# Altium PCB DDSSHEILD_rev_04.PcbDoc
Units mil, origin at the board's own origin, x right, y up, seen from the top; angles counter-clockwise.
Board outline 6000 x 4000 mil, 2 copper layers (Top Layer, Bottom Layer); 19 components, 15 nets, 90 pads, 17 vias.
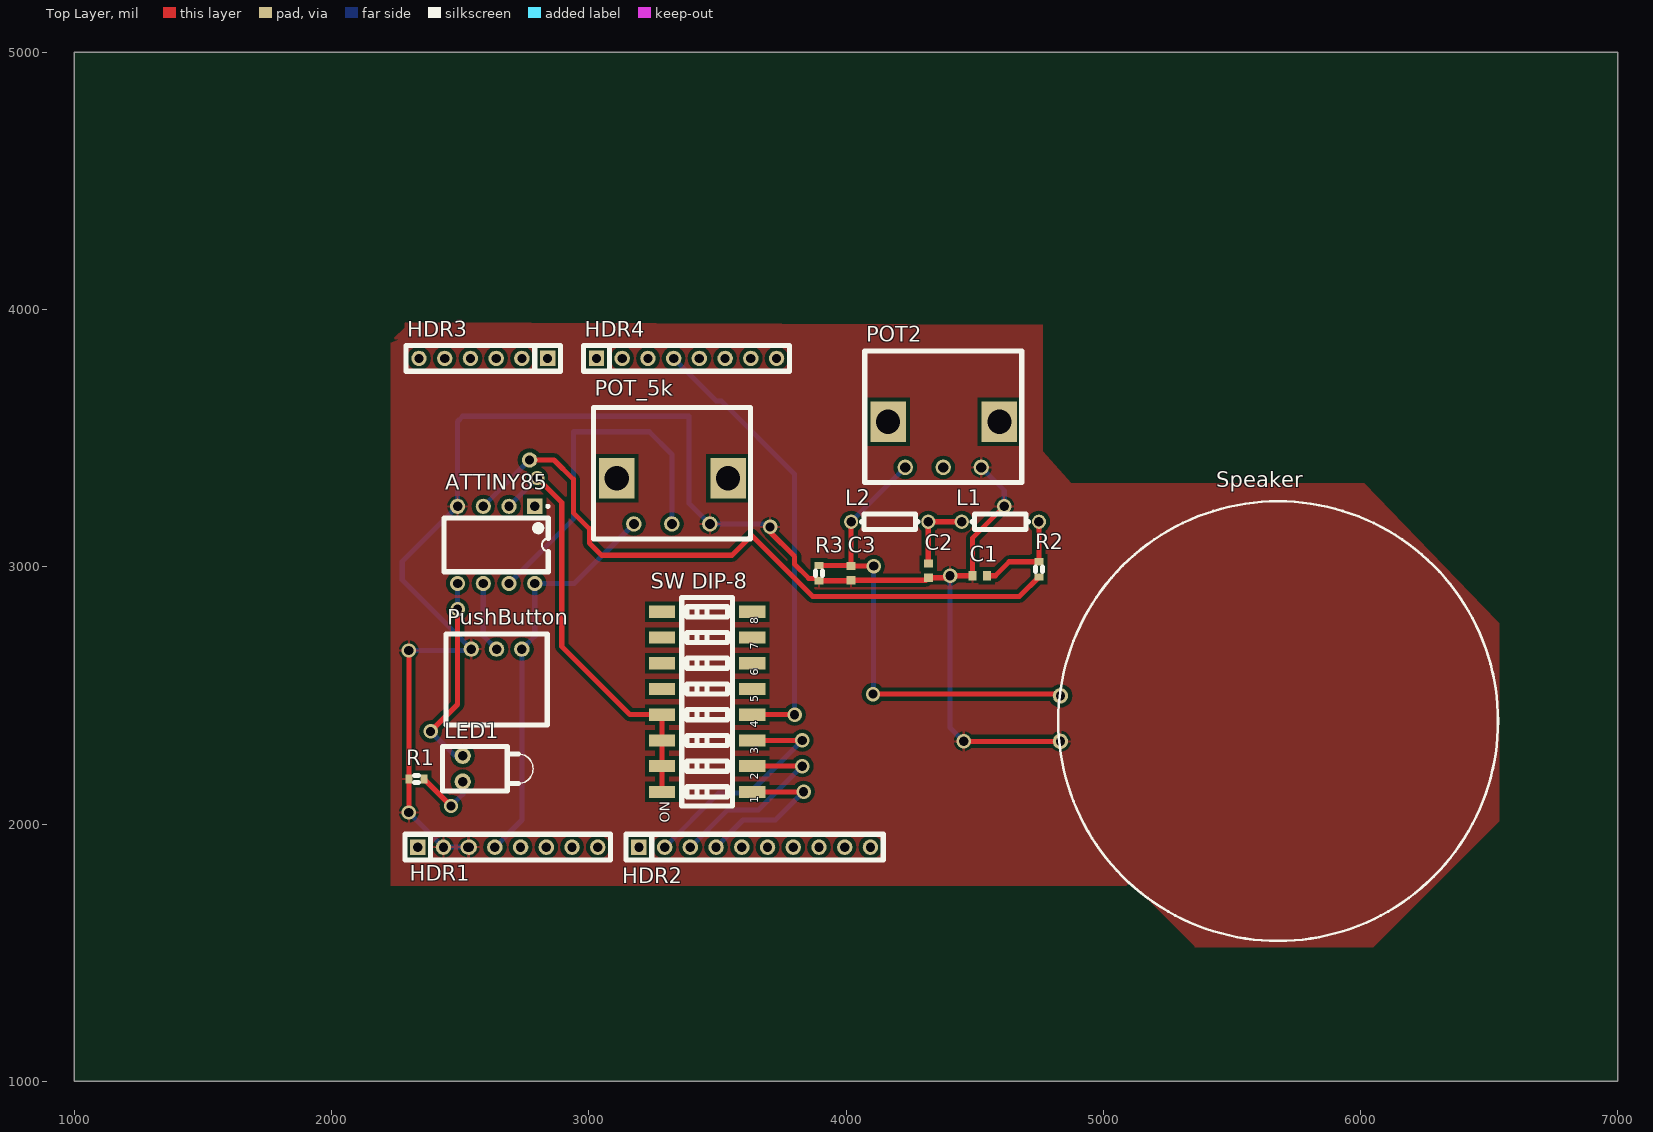
[diagram p0: Top Layer view]
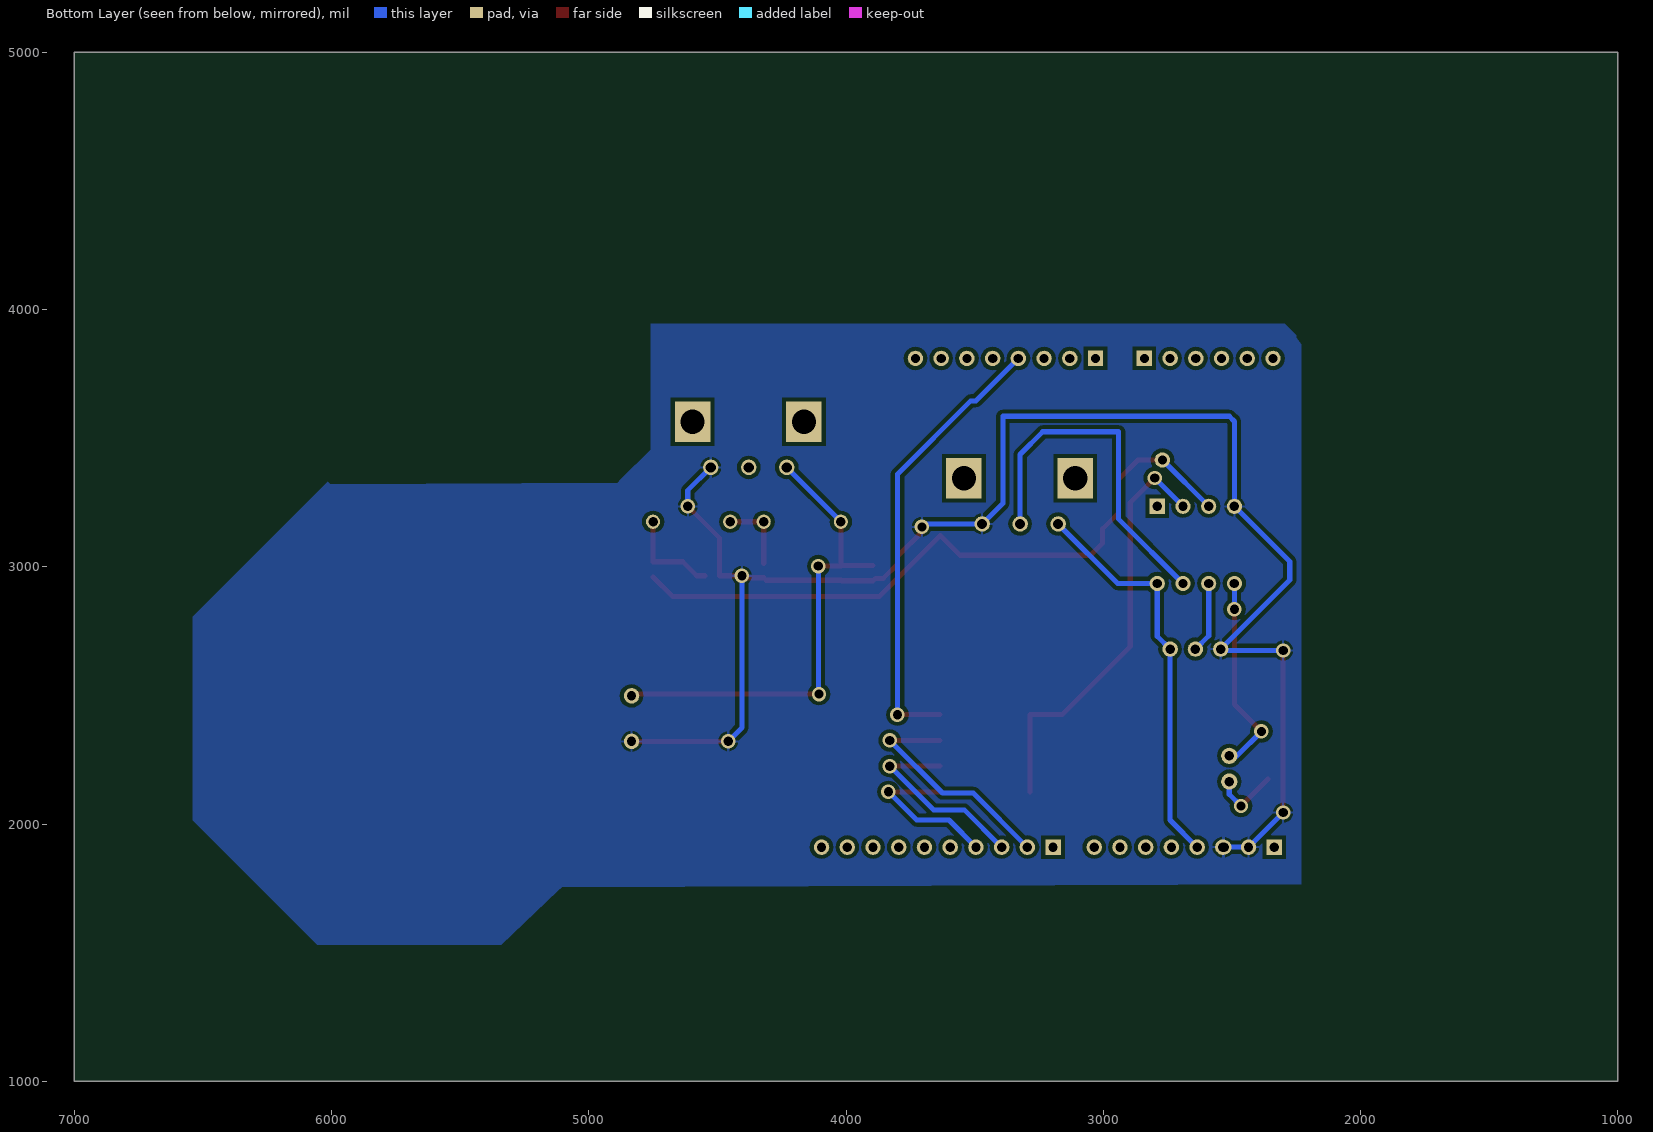
[diagram p1: Bottom Layer view, seen from below]

## Layer stack, top to bottom
Top Solder: solder mask 0.4, Solder Resist, Dk 3.5
Top Layer: signal copper 1.4
Dielectric 1: dielectric 12.6, FR-4, Dk 4.8
Bottom Layer: signal copper 1.4
Bottom Solder: solder mask 0.4, Solder Resist, Dk 3.5

## Board outline
1000,1000 7000,1000 7000,5000 1000,5000

## Design rules (kind name [scope] priority, off if disabled: settings)
Clearance Clearance_1 [All] p1: gap=10
Clearance [All] p2: gap=15
PolygonConnect [All] p1: connectstyle=Relief reliefconductorwidth=10 reliefentries=4 polygonreliefangle="90 Angle" airgapwidth=10
RoutingVias [All] p1: holewidth=28 width=50 viastyle="Through Hole" minholewidth=28 minwidth=50 maxholewidth=28 maxwidth=50
SolderMaskExpansion [All] p1: expansion=4
Width [All] p1: maxlimit=20 minlimit=10 preferedwidth=10 minimp=50.000000 maximp=50.000000 favimp=50.000000
30 further rules are at their usual default settings.

## Components (designator, comment, footprint, x,y, rotation, side; value= is the part's Value field where it differs from the comment)
ATTINY85 "IC1" DIP-8 2640,3085 r270 top
C1 "Cap Semi" 1608[0603] 4520,2965 r0 top
C2 "Cap Semi" 1608[0603] 4320,2985 r90 top
C3 "Cap Semi" 1608[0603] 4020,2975 r90 top
HDR1 "POWER_UNO" "Header 8x1 8.5mm" 2335,1910 r0 top
HDR2 "IOH" "Header 10x1 8.5mm" 3195,1910 r0 top
HDR3 "AD" "Header 6x1 8.5mm" 2840,3810 r180 top
HDR4 "IOL" "Header 8x1 8.5mm" 3030,3810 r0 top
L1 "Inductor" AXIAL-0.3 4600,3175 r180 top
L2 "Inductor" AXIAL-0.3 4170,3175 r180 top
LED1 "LED1" LED-1 2510,2215 r0 top
POT2 "Component_1" "POT Footprint_Rev_1" 4685,3840 r0 top
POT_5k "POT1" "POT Footprint_Rev_1" 3630,3620 r0 top
PushButton "BUTTON1" PushButtonFrame 2740,2680 r180 top
R1 "Res3" J1-0603 2330,2175 r0 top
R2 "Res3" J1-0603 4750,2990 r270 top
R3 "Res3" J1-0603 3895,2975 r90 top
Speaker "SPKR1" PCBComponent_1 5680,2400 r0 top
"SW DIP-8" "DIP1" DIP_SW_8WAY_SMD 3460,2475 r90 top

## Footprints (in the part's own frame and the unit in brackets; to place one, negate y for a bottom-side part, rotate by r counter-clockwise, add the part's x,y. Pads: shape width x height; smd on the part's side, far side on the other; paste and mask are expansions set on the pad)
1608[0603] [mm] "Chip Capacitor, Body 1.6x0.8mm, IPC High Density"
  rect 0.8x0.9 smd paste+0.508 mask+0.254: 1(-0.7,0) 2(0.7,0)
  body extent -0.87,-0.48 0.87,0.48, height 1.3
AXIAL-0.3 [mm] "Axial Device, Thru-Hole; 2 Leads; 0.3 in Pin Spacing"
  round 1.4 hole 0.926 paste+0.508 mask+0.254: 1(-3.81,0) 2(3.81,0)
  silkscreen extent -2.77,-0.76 2.77,0.76
DIP-8 [mm] "DIP; 8 Leads; Row Spacing 7.62 mm; Pitch 2.54 mm"
  rect 1.5x1.5 hole 0.925 paste+0.508 mask+0.254: 1(-3.81,3.81)
  round 1.5 hole 0.925 paste+0.508 mask+0.254: 2(-3.81,1.27) 3(-3.81,-1.27) 4(-3.81,-3.81) 5(3.81,-3.81) 6(3.81,-1.27) 7(3.81,1.27) 8(3.81,3.81)
  silkscreen extent -3.93,-5.15 2.65,5.24, body extent -3.6,-5.15 3.6,5.15, height 5.08
DIP_SW_8WAY_SMD [mm] "DIP Switch; 16 Leads"
  rect 1.2x2.6 smd paste+0.508 mask+0.254: 1(-8.89,-4.45) 2(-6.35,-4.45) 3(-3.81,-4.45) 4(-1.27,-4.45) 5(1.27,-4.45) 6(3.81,-4.45) 7(6.35,-4.45) 8(8.89,-4.45) 9(8.89,4.45) 10(6.35,4.45) 11(3.81,4.45) 12(1.27,4.45) 13(-1.27,4.45) 14(-3.81,4.45) 15(-6.35,4.45) 16(-8.89,4.45)
  silkscreen extent -10.29,-2.5 10.31,2.5
"Header 6x1 8.5mm" [mil] "Stackable 6 pin header"
  rect 60x60 hole 36 paste+20 mask+10: 1(0,0)
  round 60 hole 36 paste+20 mask+10: 2(100,0) 3(200,0) 4(300,0) 5(400,0) 6(500,0)
  silkscreen extent -50,-50 550,50, body extent -50,-50 550,50, height 335
"Header 8x1 8.5mm" [mil] "Stackable 8 pin header"
  rect 60x60 hole 36 paste+20 mask+10: 1(0,0)
  round 60 hole 36 paste+20 mask+10: 2(100,0) 3(200,0) 4(300,0) 5(400,0) 6(500,0) 7(600,0) 8(700,0)
  silkscreen extent -50,-50 750,50, body extent -50,-50 750,50, height 335
"Header 10x1 8.5mm" [mil] "Stackable 10 pin header"
  rect 60x60 hole 36 paste+20 mask+10: 1(0,0)
  round 60 hole 36 paste+20 mask+10: 2(100,0) 3(200,0) 4(300,0) 5(400,0) 6(500,0) 7(600,0) 8(700,0) 9(800,0) 10(900,0)
  silkscreen extent -50,-50 950,50, body extent -50,-50 950,50, height 335
J1-0603 [mm] "Chip Resistor, Body 1.6x0.8mm, IPC High Density"
  rect 0.7x0.9 smd paste+0.508 mask+0.254: 1(-0.75,0) 2(0.75,0)
  silkscreen extent -0.2,-0.35 0.2,0.35, body extent -0.85,-0.48 0.85,0.48, height 0.9
LED-1 [mm] "LED; 2 Leads"
  round 1.6 hole 0.927 paste+0.508 mask+0.254: 1(0,1.27) 2(0,-1.27)
  silkscreen extent -2,-2.2 6.95,2.2
PCBComponent_1 [mil]
  round 60 hole 36 paste+20 mask+10: 0(-846.46,98.43) 1(-846.46,-78.74)
  silkscreen extent -855,-855 855,855
"POT Footprint_Rev_1" [mm]
  round 1.524 hole 1 paste+0.508 mask+0.254: 0(-11.547,-11.521) 1(-7.797,-11.521) 2(-4.047,-11.521)
  rect 3.5x4 hole 2.4 paste+0.508 mask+0.254: Sold(-13.247,-7.021) Sold(-2.247,-7.021)
  silkscreen extent -15.55,-13.02 -0.05,-0.02
PushButtonFrame [mil]
  round 60 hole 36.5 paste+20 mask+10: 0(0,0) 1(98.43,0) 2(196.85,0)
  silkscreen extent -98,-59 295,295

## Part data
ATTINY85: library part ATtiny85-20PU, "Low Power tinyAVR® 8-Bit Microcontroller, 8K Flash Memory, 20MHz, Industrial Temperature, 8-Lead PDIP, Pb-Free"
C1 C2 C3: "Capacitor (Semiconductor SIM Model)"
LED1: "Typical RED GaAs LED"
POT2: "5k RES"
POT_5k: library part Component_1, "5k RES"
PushButton: library part PushButton
R1 R2 R3: "Resistor"
Speaker: library part Component_1
"SW DIP-8": library part "SW DIP-8", "DIP Switch, 8 Position, SPST"

## Free pads (board coordinates)
  round 60 hole 36 paste+20 mask+10: 0(2770,3415)

## Via types
v1: diameter 56, hole 36, Top Layer to Bottom Layer, 17 vias

## Nets (pads, with @x,y where several pads share a name; then routed paths per layer and width w, separated by ;. In a path a pad name is that pad's centre, name@x,y a point inside that pad or via, vN(x,y) a via of type N, cw(c..) or ccw(c..) an arc to the next point about the centre after c; other vN are vias at no path point)
ARD_SIG_HEADER_PIN_04: "SW DIP-8.4" HDR4.4 | length 1756.2
  Top Layer w20: 3635.2,2425 v1(3800,2425)
  Bottom Layer w20: HDR4.4 3495,3645 3515,3645 3800,3360 v1(3800,2425)
ARD_SIG_HEADER_PIN_09: "SW DIP-8.3" HDR2.2 | length 901.7
  Top Layer w20: 3635.2,2325 v1(3830,2325)
  Bottom Layer w20: HDR2.2 3505,2120 3625,2120 v1(3830,2325)
ARD_SIG_HEADER_PIN_10: "SW DIP-8.2" HDR2.3 | length 760.3
  Top Layer w20: 3635.2,2225 v1(3830,2225)
  Bottom Layer w20: HDR2.3 3540,2055 3660,2055 v1(3830,2225)
ARD_SIG_HEADER_PIN_11: "SW DIP-8.1" HDR2.4 | length 628.9
  Top Layer w20: 3635.2,2125 v1(3835,2125)
  Bottom Layer w20: HDR2.4 3600,2015 3725,2015 v1(3835,2125)
ARDU_TO_TINY_MAINSIGNAL: "SW DIP-8.13" "SW DIP-8.14" "SW DIP-8.15" "SW DIP-8.16" ATTINY85.2 | length 1649.5
  Top Layer w20: v1(2800,3345) 2895,3250 2895,2690 3160,2425 3284.8,2425 3284.8,2325 3284.8,2225 3284.8,2125
  Bottom Layer w20: ATTINY85.2 v1(2800,3345)
DIGITAL_MODE_SWITCH: ATTINY85.6 PushButton.1 | length 276.4
  Bottom Layer w20: ATTINY85.6 2590,2731.57 PushButton.1
"DSS RC": C1.2 L1.1 R2.1 | length 380.5
  Top Layer w20: C1.2 4580,2965 4634.53,3019.53 R2.1 L1.1
"DSS SIGNAL OUT": ATTINY85.3 pad.0 R2.2 | length 2657
  Top Layer w20: pad.0 2865,3415 2940,3340 2940,3210 3002.22,3147.78 3002.22,3092.78 3050,3045 3557.16,3045 3633.58,3121.42 3870,2885 4674.53,2885 R2.2
  Bottom Layer w20: ATTINY85.3 pad.0
GND: ATTINY85.4 C1.1 C2.1 C3.1 HDR1.2 HDR1.3 POT2.2 POT_5k.2 PushButton.2 R1.1 R3.1 Speaker.1 | length 6301.1
  Top Layer w20: v1(2300.47,2044.53) R1.1 v1(2300.47,2674.53) ; v1(2530,1910) HDR1.3 ; v1(3705,3155) 3705,3135.47 3800,3040.47 3800,3010 3855,2955 3885.47,2955 R3.1 4018.03,2945.47 C3.1 4310,2947.44 C2.1 v1@4404.53,2957.44 ; v1(4404.53,2965) C1.1 4492.44,3112.44 v1(4615,3235) ; v1(4457.8,2321.26) Speaker.1
  Bottom Layer w20: v1(2300.47,2044.53) HDR1.2 v1(2530,1910) ; v1(2300.47,2674.53) PushButton.2@2537.68,2674.53 ; PushButton.2 2275,2948.15 2275,3020 ATTINY85.4 2490,3565 2510,3585 3390,3585 3390,3247.09 POT_5k.2 3693.58,3166.42 v1(3705,3155) ; v1(4404.53,2965) 4404.53,2374.53 v1(4457.8,2321.26) ; POT2.2 4615,3297.09 v1(4615,3235)
LED_TO_RESISTOR: LED1.2 R1.2 | length 262.3
  Top Layer w20: R1.2 v1(2464.53,2070)
  Bottom Layer w20: v1(2464.53,2070) 2510,2115.47 LED1.2
MANUAL_FREQUENCY_SIGNAL: ATTINY85.7 POT_5k.1 | length 1383.6
  Bottom Layer w20: ATTINY85.7 2940,3185 2940,3525 3235,3525 3323.03,3436.97 POT_5k.1
NetC2_2: C2.2 L1.2 L2.1 | length 289.5
  Top Layer w20: C2.2 L2.1 4440,3175 L1.2@4445,3170
NetC3_2: C3.2 L2.2 POT2.0 R3.2 Speaker.0 | length 1914.1
  Top Layer w20: R3.2 4018.03,3004.53 C3.2 ; L2.2 C3.2 ; v1(4105,2505) 4826.97,2505 Speaker.0 ; v1(4107.44,3002.56) C3.2
  Bottom Layer w20: L2.2 4020,3176.02 POT2.0 ; v1(4105,2505) 4107.44,2507.44 v1(4107.44,3002.56)
TINY_TO_LED_SIGNAL_OUT: ATTINY85.5 LED1.1 | length 782.8
  Top Layer w20: v1(2385,2360) 2490,2465 v1(2490,2835)
  Bottom Layer w20: v1(2385,2360) 2480,2265 LED1.1 ; v1(2490,2835) ATTINY85.5
VCC: ATTINY85.8 HDR1.4 POT_5k.0 PushButton.0 | length 1570.5
  Bottom Layer w20: HDR1.4 2740,2015 PushButton.0 2790,2730 ATTINY85.8 2943.98,2935 POT_5k.0
pads on no net: "SW DIP-8.5" "SW DIP-8.6" "SW DIP-8.7" "SW DIP-8.8" "SW DIP-8.9" "SW DIP-8.10" "SW DIP-8.11" "SW DIP-8.12" ATTINY85.1 HDR1.1 HDR1.5 HDR1.6 HDR1.7 HDR1.8 HDR2.1 HDR2.5 HDR2.6 HDR2.7 HDR2.8 HDR2.9 HDR2.10 HDR3.1 HDR3.2 HDR3.3 HDR3.4 HDR3.5 HDR3.6 HDR4.1 HDR4.2 HDR4.3 HDR4.5 HDR4.6 HDR4.7 HDR4.8 POT2.1 POT2.Sold POT_5k.Sold

## Polygon pours and split planes (outlines as drawn)
GND on Top Layer "Top Layer-No Net" (solid, pour order 4): 2230,3870 2230,1760 5090,1760 5105,1775 5355,1525 5355,1520 6050,1520 6540,2010 6540,2025 6540,2780 6530,2790 6015,3325 5960,3325 4875,3325 4765,3450 4765,3530 4765,3940 4725,3940 2285,3950 2285,3930 2240,3885 2265,3885
GND on Bottom Layer "Top Layer-No Net" (solid, pour order 6): 2230,3865 2230,1765 5105,1755 5120,1740 5340,1530 6025,1530 6055,1530 6530,2005 6540,2015 6540,2795 6540,2805 6015,3330 6005,3320 4887.5,3327.5 4875,3340 4760,3455 4760,3945 2295,3945 2285,3935 2250,3900 2250,3890

## Silkscreen, mask and mechanical layers (free items; w line width, h text height)
Top Overlay:
  text "Vin" at 3055,6180 h20 r225
  text "GND" at 3155,6180 h20 r225
  text "GND" at 3255,6180 h20 r225
  text "5v" at 3355,6180 h20 r225
  text "3v3" at 3455,6180 h20 r225
  text "RESET" at 3555,6180 h20 r225
Mechanical 1:
  lines w20: 2220.18,1745 2295,1745 5100,1745 5335,1510 6050,1510 6555,2015 6555,2805 6020,3340 4890,3340 4775,3455 4775,3940 4760,3955 2285,3955 2220.18,3890.18 2220.18,1745

## Text inside footprints (layer, text, board x,y; h text height)
"SW DIP-8": Top Overlay "6" at 3658.11,2576.14 h31.5 r90; Top Overlay "5" at 3658.11,2473.78 h31.5 r90; Top Overlay "4" at 3658.11,2374.37 h31.5 r90; Top Overlay "3" at 3658.11,2271.02 h31.5 r90; Top Overlay "2" at 3658.11,2172.6 h31.5 r90; Top Overlay "1" at 3658.11,2081.06 h31.5 r90; Top Overlay "ON" at 3315.2,2005 h39.37 r90; Top Overlay "7" at 3658.11,2676.54 h31.5 r90; Top Overlay "8" at 3658.11,2776.54 h31.5 r90